# Altium PCB BCM_ECU_revA.PcbDoc (part 2 of 4)
Units mm, origin at the board's own origin, x right, y up, seen from the top; angles counter-clockwise.
Board outline 224 x 100 mm, 4 copper layers (TOP SIG, GND, PWR, BOT SIG), stack 0.603 mm thick; 389 components, 400 nets, 1315 pads, 143 vias.
Unrouted connection lines stored in the file: 689.
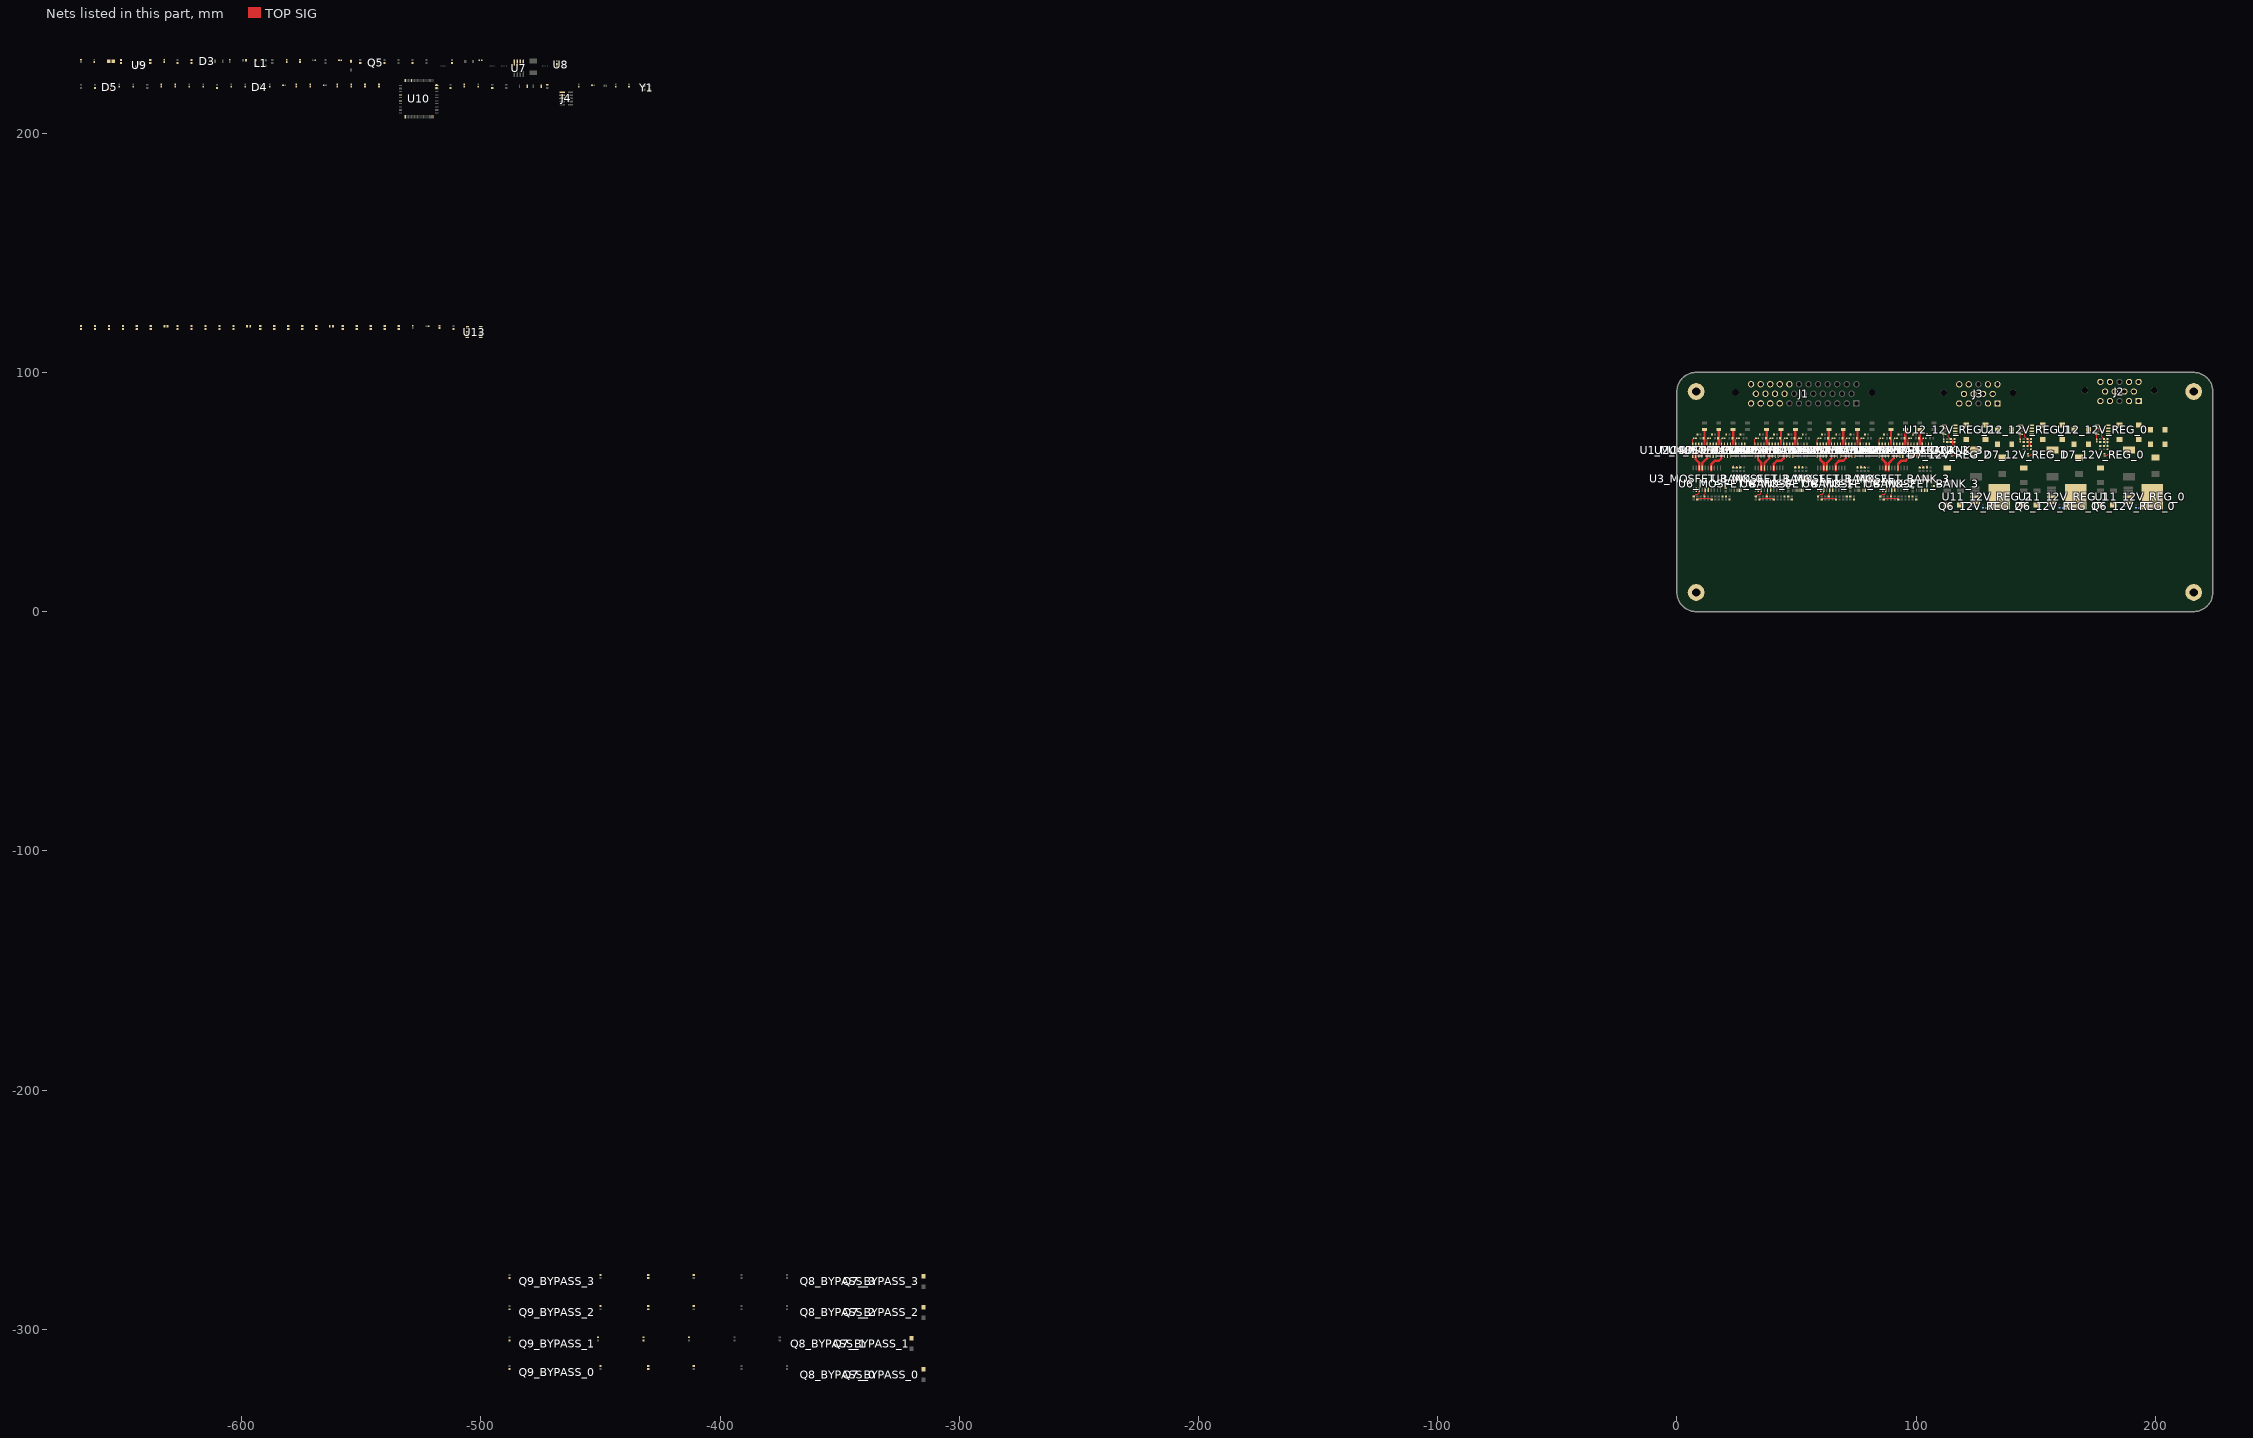
[diagram p2: the nets of this part, all layers, seen from the top]

## Footprints (in the part's own frame and the unit in brackets; to place one, negate y for a bottom-side part, rotate by r counter-clockwise, add the part's x,y. Pads: shape width x height; smd on the part's side, far side on the other; paste and mask are expansions set on the pad) (continued)
ONSC-SOD-123-2-425-04_V [mm] "SOD, 2-Leads, Body 2.69x1.6mm"
  rect 0.91x1.22 smd: 1(-1.635,0) 2(1.635,0)
  silkscreen extent -1.76,-0.8 0.78,1.28, body extent -1.35,-0.8 1.35,0.8, height 1.35
R0603B [mm] "Chip Resistor, 0603, 2-Leads, Body 1.58x0.85mm, IPC Medium Density"
  rrect25% 0.8x0.95 smd: 1(-0.65,0) 2(0.65,0)
  silkscreen extent -0.2,-0.7 0.2,0.7, body extent -0.82,-0.48 0.82,0.48, height 0.5
RESC1608X90X30ML15T20 [mm] "Chip Resistor, 2-Leads, Body 1.60x0.80mm, IPC Low Density"
  rect 0.95x1.05 smd: 1(-0.7,0) 2(0.7,0)
  body extent -0.88,-0.48 0.87,0.48, height 0.9
SISH615ADN-T1-GE3-Footprint-1 [mm]
  rect 0.35x0.5 smd paste+0 mask+0: 1(-0.937,-1.4) 2(-0.288,-1.4) 3(0.363,-1.4) 4(1.012,-1.4)
  round 0.025 smd mask+0: 5-6-7-8(0.038,0.51)
  TOP SIG region: -1.187,-0.63 -1.187,-0.215 -1.568,-0.215 -1.568,0.215 -1.187,0.215 -1.187,1.35 -1.137,1.35 -1.137,1.65 -0.737,1.65 -0.737,1.35 -0.487,1.35 -0.487,1.65 -0.088,1.65 -0.088,1.35 0.163,1.35 0.163,1.65 0.563,1.65 0.563,1.35 0.813,1.35 0.813,1.65 1.212,1.65 1.212,1.35 1.262,1.35 1.262,0.215 1.643,0.215 1.643,-0.215 1.262,-0.215 1.262,-0.63
  silkscreen extent -1.51,-2.37 1.59,-1.01, body extent -1.67,-1.75 1.74,1.75, height 0.25
SK34A-LTP-Footprint-1 [mil]
  rect 74x66 smd paste+0 mask+0: 1(-87,0) 2(87,0)
  silkscreen extent -162,-63 98,63
TCAN1146DYYRQ1-Footprint-1 [mil]
  rect 38.5x12 smd paste+0 mask+0: 1(-60.75,59.07) 2(-60.75,39.38) 3(-60.75,19.69) 4(-60.75,0) 5(-60.75,-19.69) 6(-60.75,-39.38) 7(-60.75,-59.07) 8(60.75,-59.07) 9(60.75,-39.38) 10(60.75,-19.69) 11(60.75,0) 12(60.75,19.69) 13(60.75,39.38) 14(60.75,59.07)
  silkscreen extent -46,-90 100,90, body extent -66,-84 66,84, height 43
WL-SBCD_0606 [mm] "SMT Bi-color Chip LED Diffuesed, body 1.5x1.6mm"
  rect 0.5x0.8 smd: 1(-0.45,0.8) 2(-0.45,-0.8) 3(0.45,-0.8) 4(0.45,0.8)
  silkscreen extent -0.07,1.48 0.08,1.62, body extent -0.75,-0.8 0.75,0.8, height 0.55

## Part data
C1_MOSFET_BANK_0 C1_MOSFET_BANK_1 C1_MOSFET_BANK_2 C1_MOSFET_BANK_3 C2_MOSFET_BANK_0 C2_MOSFET_BANK_1 C2_MOSFET_BANK_2 C2_MOSFET_BANK_3 C3_MOSFET_BANK_0 C3_MOSFET_BANK_1 C3_MOSFET_BANK_2 C3_MOSFET_BANK_3 C4_MOSFET_BANK_0 C4_MOSFET_BANK_1 C4_MOSFET_BANK_2 C4_MOSFET_BANK_3 C5_MOSFET_BANK_0 C5_MOSFET_BANK_1 C5_MOSFET_BANK_2 C5_MOSFET_BANK_3 C6_MOSFET_BANK_0 C6_MOSFET_BANK_1 C6_MOSFET_BANK_2 C6_MOSFET_BANK_3 C7_MOSFET_BANK_0 C7_MOSFET_BANK_1 C7_MOSFET_BANK_2 C7_MOSFET_BANK_3 C8 C9 C10 C11 C12 C13 C14 C16 C17 C48_12V_REG_0 C48_12V_REG_1 C48_12V_REG_2 C49 C50 C51: library part CMP-001-00058-1, "LARGE PADS, 0402 CAP, CHANGE COMMENT TO MATCH REAL P/N", Capacitor Type=Ceramic, Case/Package=0402, Max Operating Temperature=85°C, Min Operating Temperature=-55°C, Mounting Technology="Surface Mount", Pins=2, RoHS Compliant=Yes
C15: library part CMP-1036-04819-2, Manufacturer=Kemet, Part Number=C0805C225K9PACTU
C18 C19 C20 C21 C22 C23 C24 C25 C26 C27 C28 C29 C30 C31 C32 C33 C34 C35 C36 C37 C38 C39 C47_12V_REG_0 C47_12V_REG_1 C47_12V_REG_2: library part CMP-001-00000-11, "Non-polarized capacitor"
C40_12V_REG_0 C40_12V_REG_1 C40_12V_REG_2 C41_12V_REG_0 C41_12V_REG_1 C41_12V_REG_2 C42_12V_REG_0 C42_12V_REG_1 C42_12V_REG_2: library part CMP-04424-000178-1, "CAP TANT 68UF 10% 25V 2917", Capacitance=68uF, Case Code (Imperial)=2917, Case Code (Metric)=7343, Dielectric Material=Tantalum, ESR (Equivalent Series Resistance)=125mR, Leakage Current=17uA, Max Operating Temperature=125°C, Min Operating Temperature=-55°C, Package Quantity=1, Ripple Current=460uA, Tolerance=10%, Voltage=25V, Case/Package=2917, Depth=4.3mm, Dissipation Factor=6%, Features="General Purpose", Height=4.1mm, Height - Seated (Max)=0.169inch, Lead Free="Lead Free", Length=7.3mm, Mount="Surface Mount", Number of Pins=2, Packaging="Tape and Reel", Polarity=Polar, Radiation Hardening=No, REACH SVHC="No SVHC", RoHS Compliant=Yes, Series=TPS, Termination=SMD/SMT, Voltage Rating=25V, Voltage Rating (DC)=25V, Width=4.3mm
C43_12V_REG_0 C43_12V_REG_1 C43_12V_REG_2 C44_12V_REG_0 C44_12V_REG_1 C44_12V_REG_2 C45_12V_REG_0 C45_12V_REG_1 C45_12V_REG_2 C46_12V_REG_0 C46_12V_REG_1 C46_12V_REG_2: library part CMP-2000-07207-2, "CAP TANT 100UF 10% 16V 2917", Capacitance=100uF, Case Code (Imperial)=2917, Case Code (Metric)=7343, Dielectric Material=Tantalum, ESR (Equivalent Series Resistance)=125mR, Max Operating Temperature=125°C, Min Operating Temperature=-55°C, Package Quantity=1, Tolerance=10%, Voltage=16V, Case/Package=2917, Construction=Flat, Depth=4.3mm, Dissipation Factor=8%, Failure Rate=0.001%, Features="General Purpose", Height=2.8mm, Height - Seated (Max)=0.122inch, Length=7.3mm, Life (Hours)=2000Hour, Mount="Surface Mount", Number of Pins=2, Packaging="Tape and Reel", Polarity=Polar, Radiation Hardening=No, REACH SVHC="No SVHC", RoHS Compliant=Yes, Series=T495, Termination=SMD/SMT, Voltage Rating=16V, Voltage Rating (DC)=16V, Weight=0.023634oz, Width=0.169inch
D1: library part CMP-1060-00565-1, "Zener Voltage Regulator, 500 mW, 2-Pin SOD-123, Pb-Free, Tape and Reel", Manufacturer="On Semiconductor", ComponentLink1Description="Manufacturer URL", ComponentLink1URL=http://www.onsemi.com/, ComponentLink2Description=Datasheet, ComponentLink2URL=http://www.onsemi.com/pub_link/Collateral/MMSZ5221BT1-D.PDF, ComponentLink3Description="Package Specification", ComponentLink3URL=http://www.onsemi.com/pub_link/Collateral/425-04.PDF, DatasheetVersion="Rev. 12", Mounting Technology="Surface Mount", P Max (W)=0.5, PackageDescription="2-Pin SOD, Body 1.6 x 2.69 mm", PackageReference=SOD-123-2-425-04, PackageVersion="Rev. G, 10/2009", Packing="Tape and Reel", PartNumber=MMSZ5242BT1G, RoHS=Pb-Free, VZ Typ (V)=12
D2: library part CMP-2000-04993-2, "DIODE GEN PURP 100V 150MA SOD123", Average Rectified Current=150mA, Capacitance=4pF, Forward Voltage=1V, Max Forward Surge Current (Ifsm)=1A, Max Operating Temperature=150°C, Max Repetitive Reverse Voltage (Vrrm)=100V, Max Reverse Leakage Current=5uA, Max Surge Current=2A, Min Operating Temperature=-65°C, Package Quantity=3000, Power Dissipation=400mW, Current Rating=150mA, Element Configuration=Single, Forward Current=150mA, Height=1.2mm, Lead Free="Lead Free", Length=2.85mm, Max Reverse Voltage (DC)=100V, Mount="Surface Mount", Number of Pins=2, Output Current=150mA, Packaging="Tape and Reel", Peak Non-Repetitive Surge Current=2A, Polarity=Standard, Radiation Hardening=No, Recovery Time=4ns, Reverse Recovery Time=4ns, Voltage Rating (DC)=100V, Width=1.8mm
D3: library part CMP-12225-000055-1, "TVS DIODE 26.5V 44V SOT323-3", Breakdown Voltage=28.5V, Capacitance=3pF, Clamping Voltage=44V, Manufacturer=STMicroelectronics, Max Junction Temp=+175°C, Package=SOT323-3L, Peak Pulse Current=3A, Peak Pulse Power=170W, Reverse Standoff Voltage=26.5V, Temperature="-55°C to +175°C", Temperature Range Low=-55°C, Automotive=Yes, Automotive Grade="Grade 0", Category=Diode, ComponentLink2Description=Datasheet, ComponentLink2URL=https://www.st.com/resource/en/datasheet/esdcan02-2bwy.pdf, Device Class L1="Circuit Protection", Device Class L2="TVS Diodes", Device Class L3=unset, Digikey Description="TVS DIODE 26.5V 44V SOT323-3", Direction=Bidirectional, Height=1.1mm, Ipc Land Pattern Name=SOT65P210X95-3, Lead Free=Yes, Manufacturer Part Number=ESDCAN02-2BWY, Mouser Description="TVS Diodes / ESD Suppressors Automotive dual-line Transil, Transient voltage suppressor (TVS) for CAN bus", Number Of Channels=2, Octopart=https://octopart.com/esdcan02-2bwy-stmicroelectronics-58631133, RoHS=TRUE, Standoff Height=0mm, Temperature Range High=+175°C
D4 D5 D7_12V_REG_0 D7_12V_REG_1 D7_12V_REG_2: library part CMP-004-00040-2, "Led, Red/Grn, 180Mcd/230Mcd, 624Nm/525Nm Rohs Compliant: Yes", Component Type=Standard, Design Item ID=CMP-004-00034-2, Pins=4, Source=rgled.SchLib
D6_12V_REG_0 D6_12V_REG_1 D6_12V_REG_2: library part CMP-2000-05097-3, "DIODE SCHOTTKY 40V 5A SMC", Capacitance=300pF, Forward Current=5A, Manufacturer="Diodes Inc.", Max Junction Temp=+150°C, Max Repetitive Reverse Voltage=40V, Max Surge Forward Current=100A, Package=SMC, Peak Reverse Current=0.5mA, Temperature="-55°C to +150°C", Temperature Range Low=-55°C, Automotive=No, Automotive Grade=NA, Category=Diode, ComponentLink2Description=Datasheet, ComponentLink2URL=https://www.diodes.com/assets/Datasheets/ds13012.pdf, Device Class L1="Discrete Semiconductors", Device Class L2=Diodes, Device Class L3="Schottky Diodes", Digikey Description="DIODE SCHOTTKY 40V 5A SMC", Footprint Url=https://www.diodes.com/assets/Package-Files/SMC.pdf, Height=2.5mm, Lead Free=Yes, Manufacturer Part Number=B540C-13-F, Mouser Description="Diode: Schottky rectifying; SMD; 40V; 5A; SMC; Package: reel, tape", Octopart=https://octopart.com/b540c-13-f-diodes+inc.-325873, Reverse Voltage=40V, RoHS=TRUE, Standoff Height=0.1mm, Temperature Range High=+150°C
D8_BYPASS_0 D8_BYPASS_1 D8_BYPASS_2 D8_BYPASS_3: library part CMP-004-00058-2, "Rectifier Diode, Schottky, 1 Phase, 1 Element, 3A, 40V V(RRM), Silicon, DO-214AC", Forward Voltage=500mV, Max Operating Temperature=125°C, Pins=2, RoHS Compliant=Yes
F1: library part CMP-16042-000002-1, "DIFF P#!!! /  / FUSE BRD MNT 10A 125VAC/VDC", Fuse Current=15A, Fuse Interrupt Ac Current=50A, Fuse Interrupt Dc Current=300A, Fuse Voltage Drop=0.13V, Manufacturer="Bel Fuse", Manufacturer Part Number=0679L9150-01, Max Fuse Ac Voltage=125V, Package=0679L, Resistance=0.0038Ω, Temperature="-55°C to +125°C", Temperature Range High=+125°C, Temperature Range Low=-55°C, Automotive=Yes, Automotive Grade="Grade 1", Category=Fuse, ComponentLink2Description=Datasheet, ComponentLink2URL=https://www.belfuse.com/resources/CircuitProtection/datasheets/0679L%20Sep2016.pdf, Device Class L1="Circuit Protection", Device Class L2=Fuses, Device Class L3=unset, Digikey Description="FUSE BRD MNT 15A 125VAC/VDC", Fuse Blow Speed=Fast, Fuse I2T=103.5A2Sec, Height=2.79mm, Ipc Land Pattern Name=CAPC610254X254, Lead Free=Yes, Max Fuse Dc Voltage=125V, Octopart=https://octopart.com/0679l9150-01-bel+fuse-70850665, RoHS=TRUE, Voltage Rating=125V
F2_MOSFET_BANK_0 F2_MOSFET_BANK_1 F2_MOSFET_BANK_2 F2_MOSFET_BANK_3 F3_MOSFET_BANK_0 F3_MOSFET_BANK_1 F3_MOSFET_BANK_2 F3_MOSFET_BANK_3 F4_MOSFET_BANK_0 F4_MOSFET_BANK_1 F4_MOSFET_BANK_2 F4_MOSFET_BANK_3 F5_MOSFET_BANK_0 F5_MOSFET_BANK_1 F5_MOSFET_BANK_2 F5_MOSFET_BANK_3: library part CMP-08605-000054-1, "FUSE BOARD MNT 3A 32VAC/VDC 1206", Fuse Current=3A, Fuse Interrupt Ac Current=50A, Fuse Voltage Drop=75.99mV, Manufacturer=Littelfuse, Max Fuse Ac Voltage=32V, Package=0466, Resistance=0.019Ω, Temperature="-55°C to +90°C", Temperature Range High=+90°C, Temperature Range Low=-55°C, Automotive=No, Category=Fuse, ComponentLink2Description=Datasheet, ComponentLink2URL=https://www.littelfuse.com/~/media/electronics/datasheets/fuses/littelfuse_fuse_466_datasheet.pdf.pdf, Device Class L1="Circuit Protection", Device Class L2=Fuses, Device Class L3=unset, Digikey Description="FUSE BOARD MNT 3A 32VAC/VDC 1206", Fuse Blow Speed=Fast, Fuse I2T=0.576A2Sec, Fuse Interrupt Dc Current=50A, Height=0.66mm, Lead Free=Yes, Manufacturer Part Number=0466003.NR, Max Fuse Dc Voltage=32V, Mouser Description="Surface Mount Fuses 32V 3A VFA Slimline", Octopart=https://octopart.com/0466003.nr-littelfuse-565175, RoHS=TRUE, Voltage Rating=32V
FB1: library part CMP-0686-00252-4, "Chip Ferrite Bead, 0402, 600Ω @ 100MHz, 0.23Ω, 25%, 900mA", Case Code (Imperial)=0402, Case Code (Metric)=1005, Current Rating=900mA, DC Resistance (DCR)=230mR, Max Operating Temperature=125°C, Min Operating Temperature=-55°C, Package Quantity=10000, Test Frequency=100MHz, Tolerance=25%, Case/Package=0402, Height=0.5mm, Impedance=600R, Lead Free="Lead Free", Length=1mm, Material=Steel, Max Current Rating=900mA, Max DC Current=900mA, Number of Circuits=1, Number of Lines=1, Number of Pins=2, Packaging="Tape and Reel", Termination=SMD/SMT, Width=0.5mm
J1: library part CMP-03369-000154-1, "CONN HEADER R/A 35POS 4MM", Color=Black, Current Rating=17A, Flammability Rating="UL94 V-0", Max Operating Temperature=221°C, Max Voltage Rating (AC)=250V, Min Operating Temperature=-40°C, Package Quantity=1, Circuit Application=Power, Connector System=Wire-to-Device, Connector Type="Male Pin", Contact Material=Brass, Contact Plating=Tin, Contact Type="Male Pin", Depth=37.9mm, ELV=Compliant, Fastening Type=Ramp, Gender=Male, Height=32.1mm, Housing Material=Thermoplastic, Insulation=Insulated, Lead Free="Lead Free", Length=3.03inch, Mount="Through Hole", Number of Contacts=35, Number of Positions=35, Number of Rows=3, Number of Signal Positions=35, Orientation="Right Angle", Packaging=Bulk, PCB Mount Alignment="Yes (With)", PCB Mount Retention=With, PCB Thickness=0.062inch, Pitch=0.157inch, Primary Type=Rectangular, Radiation Hardening=No, RoHS Compliant=Yes, Row Spacing=0.157inch, Sealable="Yes (With)", Series=Ampseal, Shielding=Unshielded, Tab Thickness=1.3mm, Termination=Solder, Width=37.9mm
J2 J3: library part CMP-002-00075-1, "Combination Line Connector, 14 Contact(s), Male, Solder Terminal - MODEL IS CODE2 BUT USE CODE1", Mounting Technology=Board, RoHS Compliant=Yes
J4: library part CMP-001-0013-3, "CONN HEADER SMD 10POS 1.27MM"
L1: library part CMP-07251-000006-1, "CMC 51UH 200MA 2LN 2KOHM SMD", Case/Package=4532, Current=200mA, DC Resistance (DCR)=3.5R, Inductance=51uH, Insulation Resistance=10MR, Max Operating Temperature=125°C, Min Operating Temperature=-40°C, Package Quantity=1, Resistance=2kR, Self Resonant Frequency=100kHz, Tolerance=50%, Voltage Rating (DC)=50V, Contact Plating=Tin, Core Material=Ferrite, Current Rating=200mA, DC Current=200mA, Depth=3.4mm, Element Configuration=Dual, Height=0.118inch, Impedance=2kR, Lead Free="Lead Free", Length=4.5mm, Material=Steel, Max DC Current=200mA, Mount="Surface Mount", Number of Lines=2, Packaging="Tape and Reel", REACH SVHC="No SVHC", RoHS Compliant=Yes, Series=SRF4532, Termination=SMD/SMT, Test Frequency=100kHz, Width=0.126inch
L2_12V_REG_0 L2_12V_REG_1 L2_12V_REG_2: library part CMP-07248-000069-1, "FIXED IND 10UH 10A 16.5 MOHM SMD", Case/Package=Nonstandard, Current Rating=10A, DC Resistance (DCR)=16.5mR, Inductance=10uH, Inductance Tolerance=20%, Max Operating Temperature=150°C, Min Operating Temperature=-40°C, Package Quantity=500, Ratings=AEC-Q200, Resistor Type=Wirewound, Saturation Current=15.5A, Self Resonant Frequency=10MHz, Test Frequency=100kHz, Core Material="Carbonyl Powder", Depth=12.5mm, Height=6.2mm, Height - Seated (Max)=0.252inch, Length=13.5mm, Max DC Current=10A, Mount="Surface Mount", Packaging="Cut Tape", Q Factor=20, REACH SVHC="No SVHC", RMS Current (Irms)=10A, RoHS Compliant=Yes, Shielding=Shielded, Termination=SMD/SMT, Tolerance=20%, Width=0.492inch
Q1 Q2 Q3 Q4 Q7_BYPASS_0 Q7_BYPASS_1 Q7_BYPASS_2 Q7_BYPASS_3 Q8_BYPASS_0 Q8_BYPASS_1 Q8_BYPASS_2 Q8_BYPASS_3: library part CMP-013-00018-2, "Trans MOSFET P-CH 20V 22.1A 8-Pin PowerPAK 1212 EP T/R", Component Type=Standard, Design Item ID=CMP-013-00036-4, Pins=5, Source=SISH615ADN-T1-GE3.SchLib
Q5 Q6_12V_REG_0 Q6_12V_REG_1 Q6_12V_REG_2: library part CMP-2000-05968-1, "N-Channel Enhancement Mode Mosfet, 50 V, 200 mA, -55 to 150 degC, 6-Pin SOT-323, RoHS, Tape and Reel", Id - Continuous Drain Current=200mA, Manufacturer=DiodesIncorporated, Maximum Operating Temperature=+150C, Minimum Operating Temperature=-55C, Package / Case=SOT-323-3, Package Description="3-Pin Small Outline Transistor, Body 2 x 1.25 mm, Pitch 0.65 mm", Package Reference=SOT323, Pd - Power Dissipation=200mW, Rds On - Drain-Source Resistance=1.4Ohms, Vds - Drain-Source Breakdown Voltage=75V, Vgs - Gate-Source Voltage=20V, Brand=DiodesIncorporated, Channel Mode=Enhancement, Configuration=Single, Datasheet URL=http://www.diodes.com/_files/datasheets/ds30206.pdf, Datasheet Version="Rev. 11-2, 09/2013", Factory Pack Quantity=3000, Forward Transconductance - Min=0.1S, Height=1mm, Length=2.2mm, Manufacturer URL=http://www.diodes.com/, Mounting Style=SMD/SMT, Mounting Technology=SurfaceMount, Number Of Channels=1Channel, Packaging=Reel, Product=MOSFETSmallSignal, Product Category=MOSFET, RoHS=True, Series=BSS138, Technology=Si, Transistor Polarity=N-Channel, Transistor Type=1N-Channel, Type=EnhancementModeFieldEffectTransistor, Typical Turn-Off Delay Time=20ns, Typical Turn-On Delay Time=20ns, Unit Weight=0.000212oz, Width=1.35mm
Q9_BYPASS_0 Q9_BYPASS_1 Q9_BYPASS_2 Q9_BYPASS_3: library part CMP-35916-000023-1, "SMALL-SIGNAL MOSFET 2 IN 1 NCH +"
R1_MOSFET_BANK_0 R1_MOSFET_BANK_1 R1_MOSFET_BANK_2 R1_MOSFET_BANK_3 R2_MOSFET_BANK_0 R2_MOSFET_BANK_1 R2_MOSFET_BANK_2 R2_MOSFET_BANK_3 R3_MOSFET_BANK_0 R3_MOSFET_BANK_1 R3_MOSFET_BANK_2 R3_MOSFET_BANK_3 R4_MOSFET_BANK_0 R4_MOSFET_BANK_1 R4_MOSFET_BANK_2 R4_MOSFET_BANK_3 R5_12V_REG_0 R5_12V_REG_1 R5_12V_REG_2 R6_MOSFET_BANK_0 R6_MOSFET_BANK_1 R6_MOSFET_BANK_2 R6_MOSFET_BANK_3 R7_12V_REG_0 R7_12V_REG_1 R7_12V_REG_2 R8_MOSFET_BANK_0 R8_MOSFET_BANK_1 R8_MOSFET_BANK_2 R8_MOSFET_BANK_3 R9_MOSFET_BANK_0 R9_MOSFET_BANK_1 R9_MOSFET_BANK_2 R9_MOSFET_BANK_3 R10_MOSFET_BANK_0 R10_MOSFET_BANK_1 R10_MOSFET_BANK_2 R10_MOSFET_BANK_3 R11_MOSFET_BANK_0 R11_MOSFET_BANK_1 R11_MOSFET_BANK_2 R11_MOSFET_BANK_3 R12_MOSFET_BANK_0 R12_MOSFET_BANK_1 R12_MOSFET_BANK_2 R12_MOSFET_BANK_3 R14_MOSFET_BANK_0 R14_MOSFET_BANK_1 R14_MOSFET_BANK_2 R14_MOSFET_BANK_3 R15_MOSFET_BANK_0 R15_MOSFET_BANK_1 R15_MOSFET_BANK_2 R15_MOSFET_BANK_3 R16_MOSFET_BANK_0 R16_MOSFET_BANK_1 R16_MOSFET_BANK_2 R16_MOSFET_BANK_3 R17_MOSFET_BANK_0 R17_MOSFET_BANK_1 R17_MOSFET_BANK_2 R17_MOSFET_BANK_3 R18_MOSFET_BANK_0 R18_MOSFET_BANK_1 R18_MOSFET_BANK_2 R18_MOSFET_BANK_3 R19_MOSFET_BANK_0 R19_MOSFET_BANK_1 R19_MOSFET_BANK_2 R19_MOSFET_BANK_3 R20_MOSFET_BANK_0 R20_MOSFET_BANK_1 R20_MOSFET_BANK_2 R20_MOSFET_BANK_3 R21_MOSFET_BANK_0 R21_MOSFET_BANK_1 R21_MOSFET_BANK_2 R21_MOSFET_BANK_3 R22_MOSFET_BANK_0 R22_MOSFET_BANK_1 R22_MOSFET_BANK_2 R22_MOSFET_BANK_3 R23_MOSFET_BANK_0 R23_MOSFET_BANK_1 R23_MOSFET_BANK_2 R23_MOSFET_BANK_3 R24_MOSFET_BANK_0 R24_MOSFET_BANK_1 R24_MOSFET_BANK_2 R24_MOSFET_BANK_3 R25_MOSFET_BANK_0 R25_MOSFET_BANK_1 R25_MOSFET_BANK_2 R25_MOSFET_BANK_3 R26_MOSFET_BANK_0 R26_MOSFET_BANK_1 R26_MOSFET_BANK_2 R26_MOSFET_BANK_3 R27_MOSFET_BANK_0 R27_MOSFET_BANK_1 R27_MOSFET_BANK_2 R27_MOSFET_BANK_3 R28 R29 R30 R31 R32 R33 R34 R35 R36 R37 R38 R39 R40 R41 R42 R43 R44 R45 R46 R47 R48 R49 R50_12V_REG_0 R50_12V_REG_1 R50_12V_REG_2 R51_12V_REG_0 R51_12V_REG_1 R51_12V_REG_2 R52_12V_REG_0 R52_12V_REG_1 R52_12V_REG_2 R53_12V_REG_0 R53_12V_REG_1 R53_12V_REG_2 R54_12V_REG_0 R54_12V_REG_1 R54_12V_REG_2 R55_12V_REG_0 R55_12V_REG_1 R55_12V_REG_2 R56_BYPASS_0 R56_BYPASS_1 R56_BYPASS_2 R56_BYPASS_3 R57_BYPASS_0 R57_BYPASS_1 R57_BYPASS_2 R57_BYPASS_3 R58_BYPASS_0 R58_BYPASS_1 R58_BYPASS_2 R58_BYPASS_3 R59_BYPASS_0 R59_BYPASS_1 R59_BYPASS_2 R59_BYPASS_3 R60_BYPASS_0 R60_BYPASS_1 R60_BYPASS_2 R60_BYPASS_3 R61_BYPASS_0 R61_BYPASS_1 R61_BYPASS_2 R61_BYPASS_3 R62 R63 R64 R65 R66 R67 R68 R69 R70 R71 R72 R73 R74 R75 R76 R77 R78 R79 R80 R81 R82 R83 R84 R85 R86 R87_12V_REG_0 R87_12V_REG_1 R87_12V_REG_2: library part CMP-009-00002-14, "Resistor"
R13_MOSFET_BANK_0 R13_MOSFET_BANK_1 R13_MOSFET_BANK_2 R13_MOSFET_BANK_3: library part CMP-2000-00869-1, Manufacturer=Panasonic, Part Number=ERT-J1VR103J
SW1 SW2 SW3: library part CMP-10040-000029-1, "SWITCH TACTILE SPST-NO 0.02A 15V", Current Rating=5A, Flammability Rating="UL94 V-0", Insulation Color=Black, Max Operating Temperature=85°C, Min Operating Temperature=-40°C, Operating Force=240gf, Actuator Type=Standard, Connector Type=USB, Contact Plating=Gold, Gender=Receptacle, Illumination Type=Non-Illuminated, Mechanical Life=500000Cycles, Mount="Surface Mount", Number of Contacts=24, Number of Ports=1, Packaging="Tape and Reel", Switch Function=Off-Mom, Switch Travel=0.13mm, Termination=Solder, Throw Configuration=SPST
U1_MOSFET_BANK_0 U1_MOSFET_BANK_1 U1_MOSFET_BANK_2 U1_MOSFET_BANK_3 U2_MOSFET_BANK_0 U2_MOSFET_BANK_1 U2_MOSFET_BANK_2 U2_MOSFET_BANK_3 U4_MOSFET_BANK_0 U4_MOSFET_BANK_1 U4_MOSFET_BANK_2 U4_MOSFET_BANK_3 U5_MOSFET_BANK_0 U5_MOSFET_BANK_1 U5_MOSFET_BANK_2 U5_MOSFET_BANK_3 U12_12V_REG_0 U12_12V_REG_1 U12_12V_REG_2: library part CMP-1557-00012-2, "SENSOR CURRENT HALL 12.5A AC/DC", Case/Package=SOIC, Current Sensing=12.5A, Frequency=100kHz, Max Operating Temperature=125°C, Max Supply Current=5.5mA, Max Supply Voltage=5.5V, Min Operating Temperature=-40°C, Min Supply Voltage=3V, Operating Supply Voltage=3.3V, Package Quantity=1, Quiescent Current=4mA, -3db Bandwidth=100kHz, Accuracy=5%, Bandwidth=100kHz, Height=1.5mm, Length=4.9mm, Linearity=1%, Number Of Channels=1, Number of Pins=8, Packaging="Tape and Reel", Polarity=Bidirectional, REACH SVHC="No SVHC", Response Time=4.6us, RoHS Compliant=Yes, Sensitivity=110mV/A, Series=-, Width=3.9mm
U3_MOSFET_BANK_0 U3_MOSFET_BANK_1 U3_MOSFET_BANK_2 U3_MOSFET_BANK_3: library part CMP-1095-00041-1, "Smart High-Side Power Switch for Industrial Applications 4 Channels: 4 x 140 mOhm Status Feedback, 5.5 to 40 V Operating, -30 to 85 degC, PG-DSO-20-32, Reel, Green", Load Current (typ)="1.3Â A", Manufacturer=Infineon, Operating Voltage Range (max)="40 V", Operating Voltage Range (min)="5.5Â V", Channels=4, ComponentLink1Description="Manufacturer URL", ComponentLink1URL=http://www.infineon.com/, ComponentLink2Description=Datasheet, ComponentLink2URL=http://www.infineon.com/dgdl/ITS716G_DS11_20081002.pdf?folderId=db3a304412b407950112b408e8c90004&fileId=db3a304412b407950112b428c2cf3e6d, ComponentLink3Description="Package Specification", ComponentLink3URL=http://www.infineon.com/dgdl/BTS+4130QGA_DS10+_neu.pdf?folderId=db3a304314dca389011537739e37155f&fileId=db3a30431a5c32f2011a957932285680&sId=db3a30433d68e984013d7f42d6576278, DatasheetVersion="Rev. 1.1", Diagnostic=Digital, Green=TRUE, Halogen-free=available, IL (nom)min - all channels active="1.3Â A", IL (nom)min - one channel active="2.3Â A", IL (SC)="9 A", IL (SCp)="9 A", Mounting Technology="Surface Mount", PackageDescription="20-Pin Plastic (Green) Dual Small Outline Package, 12.7 x 7.5 mm Body, 1.27 mm Pitch", PackageReference=PG-DSO-20-32, PackageVersion=Mar-08, Packing=Reel, PartNumber=ITS716G, Ptot (max)="3.6Â W", RON (max) @ Tj max="280 mOhm", RON @ 25 degC="140 mOhm (max)", toff (max)="270 us", ton (max)="250 us"
U6_MOSFET_BANK_0 U6_MOSFET_BANK_1 U6_MOSFET_BANK_2 U6_MOSFET_BANK_3 U13: library part CMP-0054-00372-2, "8-Channel, 50 kSPS to 200 kSPS, 8-Bit A/D Converter, 16-pin TSSOP, Pb-Free", Manufacturer="National Semiconductor", PackageTopMarking=NSUZXYTT*88S022*CIMT, PowerWise=Y, Code_JEDEC=MO-153-AB, ComponentLink1Description="ADC088S022 Datasheet", ComponentLink1URL=http://www.national.com/ds/AD/ADC088S022.pdf, ComponentLink2Description="ADC088S022 Web Page", ComponentLink2URL=http://www.national.com/pf/AD/ADC088S022.html, ComponentLink3Description="MTC16 Package Page", ComponentLink3URL=http://www.national.com/packaging/folders/mtc16.html, CompType="ADC IC", DatasheetVersion=Feb-2010, PackageDescription="Molded TSSOP, Jedec, 5 x 4.4 x 0.9mm Body, 16 Lead, 0.65mm Pitch", PackageReference=MTC16, PackageVersion="revD, Jun-2003", PinCount=16, RevisionNote="Component URLs added", RoHS=Y
U7: library part CMP-1557-00015-2, "SENSOR CURRENT HALL 25A AC/DC", Case/Package=SOIC, Current Sensing=25A, Frequency=100kHz, Max Operating Temperature=125°C, Max Supply Current=5.5mA, Max Supply Voltage=5.5V, Min Operating Temperature=-40°C, Min Supply Voltage=3V, Operating Supply Voltage=3.3V, Package Quantity=1, Quiescent Current=4mA, -3db Bandwidth=100kHz, Accuracy=4%, Bandwidth=100kHz, Height=1.5mm, Length=4.9mm, Linearity=1%, Number Of Channels=1, Number of Pins=8, Packaging="Tape and Reel", Polarity=Bidirectional, REACH SVHC="No SVHC", Response Time=4.6us, RoHS Compliant=Yes, Sensitivity=55mV/A, Series=-, Width=3.9mm
U8: library part CMP-318-000000-2, "Automotive CAN FD transceiver with watchdog, bus diagnostics and partial networking via sele 14-SOT-23-THIN -40 to 150", Component Type=Standard, Design Item ID=CMP-015-00012-2, Pin Count=14, Source=TCAN1146DYYRQ1.SchLib
U9: library part CMP-12756-000009-1, "IC REG LINEAR 5V 150MA SOT89", Ambient Temperature Range High=+85°C, Ambient Temperature Range Low=-40°C, Dropout Voltage=1000mV, Manufacturer="Diodes Inc.", Max Junction Temp=+125°C, Max Supply Voltage=40V, Min Supply Voltage=3.3V, Nominal Supply Current=2.5-25uA, Output Current=150mA, Output Voltage=5V, Package=SOT89, Temperature="-40°C to +125°C", Automotive=No, Category=IC, ComponentLink2Description=Datasheet, ComponentLink2URL=https://www.diodes.com/assets/Datasheets/AP7381.pdf, Device Class L1="Integrated Circuits (ICs)", Device Class L2="Power Management ICs", Device Class L3="Voltage Regulators - Linear", Digikey Description="IC REG LINEAR 5V 150MA SOT89", Footprint Url=https://www.diodes.com/assets/Package-Files/SOT89.pdf, Height=1.6mm, Lead Free=Yes, Manufacturer Part Number=AP7381-50Y-13, Number Of Outputs=1, Octopart=https://octopart.com/ap7381-50y-13-diodes+inc.-87775116, Output Type=Fixed, RoHS=TRUE, Temperature Range High=+125°C, Temperature Range Low=-40°C
U10: library part CMP-12105-000107-1, "IC MCU 32BIT 128KB FLASH 100LQFP"
U11_12V_REG_0 U11_12V_REG_1 U11_12V_REG_2: library part CMP-0069-00198-3, "SIMPLE SWITCHER® High Efficiency 5A Step-Down Voltage Regulator with Sync, 7-pin TO-263, Pb-Free", Manufacturer="Texas Instruments", PackageTopMarking=NSUZXYTTE#*LM2677S*-12, PowerWise=N, Code_JEDEC=MO-169-AC, ComponentLink1Description="Datasheet URL", ComponentLink1URL=http://www.ti.com/general/docs/lit/getliterature.tsp?genericPartNumber=LM2677&fileType=pdf, CompType=Switcher, PackageDescription="TO-263, Molded, .400 x .390 x .180in Body, 7 Lead, .050in Pitch, Surface Mount", PackageReference=KTW0007B, PinCount=7, RoHS=Y
Y1: library part CMP-27762-011708-1, "Crystal 48MHz ±20ppm 18pF SMD-4 3.2mm x 2.5mm", Case/Package=CSMD, ESR (Equivalent Series Resistance)=35R, Frequency=48MHz, Frequency Stability=50ppm, Frequency Tolerance=20ppm, Load Capacitance=18pF, Max Operating Temperature=70°C, Min Operating Temperature=-20°C, Operating Frequency="48 MHz", Package Quantity=1000, Resistor Type=Ceramic, Depth=2.5mm, Height=0.031inch, Lead Free="Lead Free", Length=3.2mm, Mount="Surface Mount", Number of Pins=4, Packaging="Tape and Reel", Radiation Hardening=No, REACH SVHC="No SVHC", RoHS Compliant=Yes, Series=ABM8, Series Resistance=35R, Termination=SMD/SMT, Tolerance=20ppm, Width=0.098inch
Y2: library part CMP-40224-000006-1, "CRYSTAL 32.7680KHZ 12.5PF SMD", Frequency=32.768kHz, Load Capacitance=12.5pF, Manufacturer="ECS International", Package=ECX-1210, Temperature="-40°C to +85°C", Temperature Range High=+85°C, Temperature Range Low=-40°C, Tolerance=20ppm, Automotive=No, Category=Crys, ComponentLink2Description=Datasheet, ComponentLink2URL=https://ecsxtal.com/store/pdf/ECX-1210.pdf, Device Class L1="Passive Components", Device Class L2="Crystals / Oscillators", Device Class L3=Crystals, Digikey Description="CRYSTAL 32.7680KHZ 12.5PF SMD", Esr=90kΩ, Height=0.5mm, Lead Free=Yes, Manufacturer Part Number=ECS-.327-12.5-1210-TR, Octopart=https://octopart.com/ecs-.327-12.5-1210-tr-ecs+international-81221340, RoHS=TRUE, Series=ECX-1210

## Free pads (board coordinates)
  round 7 hole 3.5: 2(8,8) 2(8,92) 2(216,92) 2(216,8)

## Via types
v1: diameter 0.5, hole 0.3, TOP SIG to BOT SIG, 143 vias

## Nets (pads, with @x,y where several pads share a name; then routed paths per layer and width w, separated by ;. In a path a pad name is that pad's centre, name@x,y a point inside that pad or via, vN(x,y) a via of type N, cw(c..) or ccw(c..) an arc to the next point about the centre after c; other vN are vias at no path point)
3V3: C1_MOSFET_BANK_0.1 C1_MOSFET_BANK_1.1 C1_MOSFET_BANK_2.1 C1_MOSFET_BANK_3.1 C2_MOSFET_BANK_0.1 C2_MOSFET_BANK_1.1 C2_MOSFET_BANK_2.1 C2_MOSFET_BANK_3.1 C3_MOSFET_BANK_0.1 C3_MOSFET_BANK_1.1 C3_MOSFET_BANK_2.1 C3_MOSFET_BANK_3.1 C4_MOSFET_BANK_0.1 C4_MOSFET_BANK_1.1 C4_MOSFET_BANK_2.1 C4_MOSFET_BANK_3.1 C5_MOSFET_BANK_0.1 C5_MOSFET_BANK_1.1 C5_MOSFET_BANK_2.1 C5_MOSFET_BANK_3.1 C8.1 C10.1 C22.1 C24.2 C25.2 C26.2 C27.2 C28.2 C29.2 C36.2 C37.2 C48_12V_REG_0.1 C48_12V_REG_1.1 C48_12V_REG_2.1 C49.1 D4.2 D4.3 D5.2 D5.3 D7_12V_REG_0.3 D7_12V_REG_1.3 D7_12V_REG_2.3 FB1.1 J4.1 R9_MOSFET_BANK_0.2 R9_MOSFET_BANK_1.2 R9_MOSFET_BANK_2.2 R9_MOSFET_BANK_3.2 R11_MOSFET_BANK_0.2 R11_MOSFET_BANK_1.2 R11_MOSFET_BANK_2.2 R11_MOSFET_BANK_3.2 R12_MOSFET_BANK_0.2 R12_MOSFET_BANK_1.2 R12_MOSFET_BANK_2.2 R12_MOSFET_BANK_3.2 R13_MOSFET_BANK_0.2 R13_MOSFET_BANK_1.2 R13_MOSFET_BANK_2.2 R13_MOSFET_BANK_3.2 R18_MOSFET_BANK_0.1 R18_MOSFET_BANK_1.1 R18_MOSFET_BANK_2.1 R18_MOSFET_BANK_3.1 R41.2 R45.1 R51_12V_REG_0.1 R51_12V_REG_1.1 R51_12V_REG_2.1 R62.1 R63.2 R64.2 R65.2 R66.2 R67.2 R68.2 R69.2 R70.2 SW2.2 U1_MOSFET_BANK_0.8 U1_MOSFET_BANK_1.8 U1_MOSFET_BANK_2.8 U1_MOSFET_BANK_3.8 U2_MOSFET_BANK_0.8 U2_MOSFET_BANK_1.8 U2_MOSFET_BANK_2.8 U2_MOSFET_BANK_3.8 U4_MOSFET_BANK_0.8 U4_MOSFET_BANK_1.8 U4_MOSFET_BANK_2.8 U4_MOSFET_BANK_3.8 U5_MOSFET_BANK_0.8 U5_MOSFET_BANK_1.8 U5_MOSFET_BANK_2.8 U5_MOSFET_BANK_3.8 U6_MOSFET_BANK_0.2 U6_MOSFET_BANK_1.2 U6_MOSFET_BANK_2.2 U6_MOSFET_BANK_3.2 U7.8 U8.5 U10.6 U10.11 U10.27 U10.50 U10.75 U10.100 U12_12V_REG_0.8 U12_12V_REG_1.8 U12_12V_REG_2.8 U13.2 | length 129.4
  TOP SIG w0.254: R12_MOSFET_BANK_0.2@8.5,46.85 8.575,46.85 9.204,47.479 13.796,47.479 14.425,46.85 R11_MOSFET_BANK_0.2@14.5,46.85 ; R12_MOSFET_BANK_1.2@34.5,46.85 34.575,46.85 35.204,47.479 39.796,47.479 40.425,46.85 R11_MOSFET_BANK_1.2@40.5,46.85 ; R12_MOSFET_BANK_2.2@60.5,46.85 60.575,46.85 61.204,47.479 65.796,47.479 66.425,46.85 R11_MOSFET_BANK_2.2@66.5,46.85 ; R12_MOSFET_BANK_3.2@86.5,46.85 86.575,46.85 87.204,47.479 91.796,47.479 92.425,46.85 R11_MOSFET_BANK_3.2@92.5,46.85
  TOP SIG w0.3: U6_MOSFET_BANK_0.2@26.125,56.3 26.135,56.29 26.135,55.54 26.674,55 28.021,55 ; R18_MOSFET_BANK_0.1@28.35,54 28.272,54.078 28.272,54.749 28.021,55 ; C5_MOSFET_BANK_0.1@28.521,55.5 28.5,55.5 28.314,55.314 28.314,55.292 28.021,55 ; U6_MOSFET_BANK_1.2@52.125,56.3 52.135,56.29 52.135,55.54 52.674,55 54.021,55 ; R18_MOSFET_BANK_1.1@54.35,54 54.272,54.078 54.272,54.749 54.021,55 ; C5_MOSFET_BANK_1.1@54.521,55.5 54.5,55.5 54.314,55.314 54.314,55.292 54.021,55 ; U6_MOSFET_BANK_2.2@78.125,56.3 78.135,56.29 78.135,55.54 78.674,55 80.021,55 ; R18_MOSFET_BANK_2.1@80.35,54 80.272,54.078 80.272,54.749 80.021,55 ; C5_MOSFET_BANK_2.1@80.521,55.5 80.5,55.5 80.314,55.314 80.314,55.292 80.021,55 ; U6_MOSFET_BANK_3.2@104.125,56.3 104.135,56.29 104.135,55.54 104.674,55 106.021,55 ; R18_MOSFET_BANK_3.1@106.35,54 106.272,54.078 106.272,54.749 106.021,55 ; C5_MOSFET_BANK_3.1@106.521,55.5 106.5,55.5 106.314,55.314 106.314,55.292 106.021,55 ; U12_12V_REG_2.8@111.5,73.983 111.612,74.095 U12_12V_REG_2.8@111.684,74.095 ; U12_12V_REG_1.8@143.5,73.983 143.612,74.095 U12_12V_REG_1.8@143.684,74.095 ; U12_12V_REG_0.8@175.5,73.983 175.612,74.095 U12_12V_REG_0.8@175.684,74.095
  TOP SIG w0.5: v1(7,68) 6.595,68.405 U1_MOSFET_BANK_0.8@6.595,69.816 6.595,72.095 7,72.5 C1_MOSFET_BANK_0.1@7.021,72.5 ; v1(13,68) 12.595,68.405 U2_MOSFET_BANK_0.8@12.595,69.816 12.595,72.095 13,72.5 C2_MOSFET_BANK_0.1@13.021,72.5 ; v1(19,68) 18.595,68.405 U4_MOSFET_BANK_0.8@18.595,69.816 18.595,72.095 19,72.5 C3_MOSFET_BANK_0.1@19.021,72.5 ; v1(25,68) 24.595,68.405 U5_MOSFET_BANK_0.8@24.595,69.816 24.595,72.095 25,72.5 C4_MOSFET_BANK_0.1@25.021,72.5 ; v1(33,68) 32.595,68.405 U1_MOSFET_BANK_1.8@32.595,69.816 32.595,72.095 33,72.5 C1_MOSFET_BANK_1.1@33.021,72.5 ; v1(39,68) 38.595,68.405 U2_MOSFET_BANK_1.8@38.595,69.816 38.595,72.095 39,72.5 C2_MOSFET_BANK_1.1@39.021,72.5 ; v1(45,68) 44.595,68.405 U4_MOSFET_BANK_1.8@44.595,69.816 44.595,72.095 45,72.5 C3_MOSFET_BANK_1.1@45.021,72.5 ; v1(51,68) 50.595,68.405 U5_MOSFET_BANK_1.8@50.595,69.816 50.595,72.095 51,72.5 C4_MOSFET_BANK_1.1@51.021,72.5 ; v1(59,68) 58.595,68.405 U1_MOSFET_BANK_2.8@58.595,69.816 58.595,72.095 59,72.5 C1_MOSFET_BANK_2.1@59.021,72.5 ; v1(65,68) 64.595,68.405 U2_MOSFET_BANK_2.8@64.595,69.816 64.595,72.095 65,72.5 C2_MOSFET_BANK_2.1@65.021,72.5 ; v1(71,68) 70.595,68.405 U4_MOSFET_BANK_2.8@70.595,69.816 70.595,72.095 71,72.5 C3_MOSFET_BANK_2.1@71.021,72.5 ; v1(77,68) 76.595,68.405 U5_MOSFET_BANK_2.8@76.595,69.816 76.595,72.095 77,72.5 C4_MOSFET_BANK_2.1@77.021,72.5 ; v1(85,68) 84.595,68.405 U1_MOSFET_BANK_3.8@84.595,69.816 84.595,72.095 85,72.5 C1_MOSFET_BANK_3.1@85.021,72.5 ; v1(91,68) 90.595,68.405 U2_MOSFET_BANK_3.8@90.595,69.816 90.595,72.095 91,72.5 C2_MOSFET_BANK_3.1@91.021,72.5 ; v1(97,68) 96.595,68.405 U4_MOSFET_BANK_3.8@96.595,69.816 96.595,72.095 97,72.5 C3_MOSFET_BANK_3.1@97.021,72.5 ; v1(103,68) 102.595,68.405 U5_MOSFET_BANK_3.8@102.595,69.816 102.595,72.095 103,72.5 C4_MOSFET_BANK_3.1@103.021,72.5 ; C48_12V_REG_2.1@111.5,71.979 U12_12V_REG_2.8@111.5,73.983 ; C48_12V_REG_1.1@143.5,71.979 U12_12V_REG_1.8@143.5,73.983 ; C48_12V_REG_0.1@175.5,71.979 U12_12V_REG_0.8@175.5,73.983
5V: C9.1 C15.2 R39.2 U8.3 U9.1
12V_FB_12V_REG_0: C43_12V_REG_0.2 C44_12V_REG_0.2 C45_12V_REG_0.2 C46_12V_REG_0.2 D7_12V_REG_0.2 L2_12V_REG_0.2 R5_12V_REG_0.1 U11_12V_REG_0.6 U12_12V_REG_0.1 U12_12V_REG_0.2 | length 3.1
  TOP SIG w0.3: D7_12V_REG_0.2@178.8,65.05 179.55,65.05 180.25,65.75 181.5,65.75 ; R5_12V_REG_0.1@180,72.15 R5_12V_REG_0.1@180.075,72.15
  other v1: 188.65,45.46
12V_FB_12V_REG_1: C43_12V_REG_1.2 C44_12V_REG_1.2 C45_12V_REG_1.2 C46_12V_REG_1.2 D7_12V_REG_1.2 L2_12V_REG_1.2 R5_12V_REG_1.1 U11_12V_REG_1.6 U12_12V_REG_1.1 U12_12V_REG_1.2 | length 3.1
  TOP SIG w0.3: D7_12V_REG_1.2@146.8,65.05 147.55,65.05 148.25,65.75 149.5,65.75 ; R5_12V_REG_1.1@148,72.15 R5_12V_REG_1.1@148.075,72.15
  other v1: 156.65,45.46
12V_FB_12V_REG_2: C43_12V_REG_2.2 C44_12V_REG_2.2 C45_12V_REG_2.2 C46_12V_REG_2.2 D7_12V_REG_2.2 L2_12V_REG_2.2 R5_12V_REG_2.1 U11_12V_REG_2.6 U12_12V_REG_2.1 U12_12V_REG_2.2 | length 3.1
  TOP SIG w0.3: D7_12V_REG_2.2@114.8,65.05 115.55,65.05 116.25,65.75 117.5,65.75 ; R5_12V_REG_2.1@116,72.15 R5_12V_REG_2.1@116.075,72.15
  other v1: 124.65,45.46
12V_LL_I_SENSE_12V_REG_0: R87_12V_REG_0.1
12V_LL_I_SENSE_12V_REG_1: R87_12V_REG_1.1
12V_LL_I_SENSE_12V_REG_2: R87_12V_REG_2.1
12V_LL_V_SENSE_12V_REG_0: R5_12V_REG_0.2 R7_12V_REG_0.1 | length 1.7
  TOP SIG w0.3: R7_12V_REG_0.1@180,69.15 R5_12V_REG_0.2@180,70.85
12V_LL_V_SENSE_12V_REG_1: R5_12V_REG_1.2 R7_12V_REG_1.1 | length 1.7
  TOP SIG w0.3: R7_12V_REG_1.1@148,69.15 R5_12V_REG_1.2@148,70.85
12V_LL_V_SENSE_12V_REG_2: R5_12V_REG_2.2 R7_12V_REG_2.1 | length 1.7
  TOP SIG w0.3: R7_12V_REG_2.1@116,69.15 R5_12V_REG_2.2@116,70.85
12V_OUT_12V_REG_0: J2.1 J2.2 J2.4 J2.5 U12_12V_REG_0.3 U12_12V_REG_0.4
12V_OUT_12V_REG_1: J3.1 J3.2 U12_12V_REG_1.3 U12_12V_REG_1.4
12V_OUT_12V_REG_2: J3.4 J3.5 U12_12V_REG_2.3 U12_12V_REG_2.4
ADC_IN0: R71.1 R79.2 U13.4
ADC_IN1: R72.1 R80.2 U13.5
ADC_IN2: R73.1 R81.2 U13.6
ADC_IN3: R74.1 R82.2 U13.7
ADC_IN4: R75.1 R83.2 U13.8
ADC_IN5: R76.1 R84.2 U13.9
ADC_IN6: R77.1 R85.2 U13.10
ADC_IN7: R78.1 R86.2 U13.11
ADC_MISO: U13.15
ADC_MISO_MOSFET_BANK_0: U6_MOSFET_BANK_0.15 U6_MOSFET_BANK_1.15 U6_MOSFET_BANK_2.15 U6_MOSFET_BANK_3.15
ADC_MOSI: U13.14
ADC_MOSI_MOSFET_BANK_0: U6_MOSFET_BANK_0.14 U6_MOSFET_BANK_1.14 U6_MOSFET_BANK_2.14 U6_MOSFET_BANK_3.14
ADC_nCS: U13.1
ADC_nCS_MOSFET_BANK_0: U6_MOSFET_BANK_0.1
ADC_nCS_MOSFET_BANK_1: U6_MOSFET_BANK_1.1
ADC_nCS_MOSFET_BANK_2: U6_MOSFET_BANK_2.1
ADC_nCS_MOSFET_BANK_3: U6_MOSFET_BANK_3.1
ADC_SCLK: U13.16
ADC_SCLK_MOSFET_BANK_0: U6_MOSFET_BANK_0.16 U6_MOSFET_BANK_1.16 U6_MOSFET_BANK_2.16 U6_MOSFET_BANK_3.16
ADDR_PWM_0: J2.10
ADDR_PWM_1: J2.11
ADDR_PWM_2: J2.13
ADDR_PWM_3: J2.14
ADDR_PWM_4: J3.10
ADDR_PWM_5: J3.11
ADDR_PWM_6: J3.13
ADDR_PWM_7: J3.14
BOOT: C22.2 R42.1 R44.2 U10.94
CAN_INH: U8.7
CAN_MISO: U8.6
CAN_MOSI: U8.11
CAN_N: C12.1 D3.1 J1.35 L1.4 R36.2 R37.2
CAN_nCS: U8.14
CAN_P: C14.2 D3.2 J1.34 L1.1 R37.1 R38.1
CAN_RX: U8.4
CAN_SCLK: U8.8
CAN_TX: U8.1
CAN_VSUP: D2.2
EXT_IN_0: D8_BYPASS_0.2 J1.20
EXT_IN_1: D8_BYPASS_1.2 J1.21
EXT_IN_2: D8_BYPASS_2.2 J1.31
EXT_IN_3: D8_BYPASS_3.2 J1.32
G_LED: R46.1 U10.15
GATE_BYPASS_0: Q7_BYPASS_0.4 Q8_BYPASS_0.4 R58_BYPASS_0.2 R59_BYPASS_0.1
GATE_BYPASS_1: Q7_BYPASS_1.4 Q8_BYPASS_1.4 R58_BYPASS_1.2 R59_BYPASS_1.1
GATE_BYPASS_2: Q7_BYPASS_2.4 Q8_BYPASS_2.4 R58_BYPASS_2.2 R59_BYPASS_2.1
GATE_BYPASS_3: Q7_BYPASS_3.4 Q8_BYPASS_3.4 R58_BYPASS_3.2 R59_BYPASS_3.1
GND: C1_MOSFET_BANK_0.2 C1_MOSFET_BANK_1.2 C1_MOSFET_BANK_2.2 C1_MOSFET_BANK_3.2 C2_MOSFET_BANK_0.2 C2_MOSFET_BANK_1.2 C2_MOSFET_BANK_2.2 C2_MOSFET_BANK_3.2 C3_MOSFET_BANK_0.2 C3_MOSFET_BANK_1.2 C3_MOSFET_BANK_2.2 C3_MOSFET_BANK_3.2 C4_MOSFET_BANK_0.2 C4_MOSFET_BANK_1.2 C4_MOSFET_BANK_2.2 C4_MOSFET_BANK_3.2 C5_MOSFET_BANK_0.2 C5_MOSFET_BANK_1.2 C5_MOSFET_BANK_2.2 C5_MOSFET_BANK_3.2 C6_MOSFET_BANK_0.2 C6_MOSFET_BANK_1.2 C6_MOSFET_BANK_2.2 C6_MOSFET_BANK_3.2 C7_MOSFET_BANK_0.2 C7_MOSFET_BANK_1.2 C7_MOSFET_BANK_2.2 C7_MOSFET_BANK_3.2 C8.2 C9.2 C10.2 C11.2 C12.2 C13.2 C14.1 C15.1 C16.2 C17.1 C18.1 C19.1 C20.1 C21.1 C23.1 C24.1 C25.1 C26.1 C27.1 C28.1 C29.1 C30.1 C31.1 C32.1 C33.1 C34.1 C35.1 C36.1 C37.1 C38.1 C39.1 C40_12V_REG_0.1 C40_12V_REG_1.1 C40_12V_REG_2.1 C41_12V_REG_0.1 C41_12V_REG_1.1 C41_12V_REG_2.1 C42_12V_REG_0.1 C42_12V_REG_1.1 C42_12V_REG_2.1 C43_12V_REG_0.1 C43_12V_REG_1.1 C43_12V_REG_2.1 C44_12V_REG_0.1 C44_12V_REG_1.1 C44_12V_REG_2.1 C45_12V_REG_0.1 C45_12V_REG_1.1 C45_12V_REG_2.1 C46_12V_REG_0.1 C46_12V_REG_1.1 C46_12V_REG_2.1 C48_12V_REG_0.2 C48_12V_REG_1.2 C48_12V_REG_2.2 C49.2 C50.2 C51.2 D3.3 D6_12V_REG_0.2 D6_12V_REG_1.2 D6_12V_REG_2.2 J2.6 J2.7 J2.8 J2.9 J3.6 J3.7 J3.8 J3.9 J4.3 J4.5 pad.2 Q5.2 Q6_12V_REG_0.2 Q6_12V_REG_1.2 Q6_12V_REG_2.2 Q9_BYPASS_0.1 Q9_BYPASS_1.1 Q9_BYPASS_2.1 Q9_BYPASS_3.1 R7_12V_REG_0.2 R7_12V_REG_1.2 R7_12V_REG_2.2 R14_MOSFET_BANK_0.2 R14_MOSFET_BANK_1.2 R14_MOSFET_BANK_2.2 R14_MOSFET_BANK_3.2 R24_MOSFET_BANK_0.2 R24_MOSFET_BANK_1.2 R24_MOSFET_BANK_2.2 R24_MOSFET_BANK_3.2 R25_MOSFET_BANK_0.2 R25_MOSFET_BANK_1.2 R25_MOSFET_BANK_2.2 R25_MOSFET_BANK_3.2 R26_MOSFET_BANK_0.2 R26_MOSFET_BANK_1.2 R26_MOSFET_BANK_2.2 R26_MOSFET_BANK_3.2 R27_MOSFET_BANK_0.2 R27_MOSFET_BANK_1.2 R27_MOSFET_BANK_2.2 R27_MOSFET_BANK_3.2 R28.1 R30.1 R33.1 R40.1 R44.1 R48.1 R50_12V_REG_0.2 R50_12V_REG_1.2 R50_12V_REG_2.2 R53_12V_REG_0.2 R53_12V_REG_1.2 R53_12V_REG_2.2 R54_12V_REG_0.1 R54_12V_REG_1.1 R54_12V_REG_2.1 R59_BYPASS_0.2 R59_BYPASS_1.2 R59_BYPASS_2.2 R59_BYPASS_3.2 R61_BYPASS_0.1 R61_BYPASS_1.1 R61_BYPASS_2.1 R61_BYPASS_3.1 R79.1 R80.1 R81.1 R82.1 R83.1 R84.1 R85.1 R86.1 SW1.1 SW3.2 U1_MOSFET_BANK_0.5 U1_MOSFET_BANK_1.5 U1_MOSFET_BANK_2.5 U1_MOSFET_BANK_3.5 U2_MOSFET_BANK_0.5 U2_MOSFET_BANK_1.5 U2_MOSFET_BANK_2.5 U2_MOSFET_BANK_3.5 U3_MOSFET_BANK_0.2 U3_MOSFET_BANK_0.6 U3_MOSFET_BANK_1.2 U3_MOSFET_BANK_1.6 U3_MOSFET_BANK_2.2 U3_MOSFET_BANK_2.6 U3_MOSFET_BANK_3.2 U3_MOSFET_BANK_3.6 U4_MOSFET_BANK_0.5 U4_MOSFET_BANK_1.5 U4_MOSFET_BANK_2.5 U4_MOSFET_BANK_3.5 U5_MOSFET_BANK_0.5 U5_MOSFET_BANK_1.5 U5_MOSFET_BANK_2.5 U5_MOSFET_BANK_3.5 U6_MOSFET_BANK_0.3 U6_MOSFET_BANK_0.12 U6_MOSFET_BANK_1.3 U6_MOSFET_BANK_1.12 U6_MOSFET_BANK_2.3 U6_MOSFET_BANK_2.12 U6_MOSFET_BANK_3.3 U6_MOSFET_BANK_3.12 U7.5 U8.2 U9.2 U10.10 U10.19 U10.26 U10.49 U10.74 U10.99 U11_12V_REG_0.4 U11_12V_REG_0.8 U11_12V_REG_1.4 U11_12V_REG_1.8 U11_12V_REG_2.4 U11_12V_REG_2.8 U12_12V_REG_0.5 U12_12V_REG_1.5 U12_12V_REG_2.5 U13.3 U13.12 Y1.2 Y1.4
I_nFAULT: U7.6
I_nFAULT_12V_REG_0: R51_12V_REG_0.2 R55_12V_REG_0.1 U12_12V_REG_0.6 | length 9.7
  TOP SIG w0.3: U12_12V_REG_0.6@175.684,76.635 176.255,76.635 176.367,76.523 176.367,76.233 177.5,75.1 177.5,73.15 R51_12V_REG_0.2@178.5,72.15 178.575,72.15 179.227,71.498 179.227,69.802 178.575,69.15 R55_12V_REG_0.1@178.5,69.15
I_nFAULT_12V_REG_1: R51_12V_REG_1.2 R55_12V_REG_1.1 U12_12V_REG_1.6 | length 9.7
  TOP SIG w0.3: U12_12V_REG_1.6@143.684,76.635 144.255,76.635 144.367,76.523 144.367,76.233 145.5,75.1 145.5,73.15 R51_12V_REG_1.2@146.5,72.15 146.575,72.15 147.227,71.498 147.227,69.802 146.575,69.15 R55_12V_REG_1.1@146.5,69.15
I_nFAULT_12V_REG_2: R51_12V_REG_2.2 R55_12V_REG_2.1 U12_12V_REG_2.6 | length 9.7
  TOP SIG w0.3: U12_12V_REG_2.6@111.684,76.635 112.255,76.635 112.367,76.523 112.367,76.233 113.5,75.1 113.5,73.15 R51_12V_REG_2.2@114.5,72.15 114.575,72.15 115.227,71.498 115.227,69.802 114.575,69.15 R55_12V_REG_2.1@114.5,69.15
I_nFAULT_MOSFET_BANK_0: R10_MOSFET_BANK_0.2 U1_MOSFET_BANK_0.6 U2_MOSFET_BANK_0.6 U4_MOSFET_BANK_0.6 U5_MOSFET_BANK_0.6 | length 15
  TOP SIG w0.3: v1@9,68.054 v1@9.135,68.189 ; v1@9,68.054 v1(9,68) v1@9,68.054 ; v1@9,68.054 v1@9.135,68.189 ; v1@9.135,68.189 U1_MOSFET_BANK_0.6@9.135,69.816 v1@9.135,68.189 ; v1@15,68.054 v1@15.135,68.189 ; v1@15,68.054 v1(15,68) v1@15,68.054 ; v1@15,68.054 v1@15.135,68.189 ; v1@15.135,68.189 U2_MOSFET_BANK_0.6@15.135,69.816 v1@15.135,68.189 ; v1@21,68.054 v1@21.135,68.189 ; v1@21,68.054 v1(21,68) v1@21,68.054 ; v1@21,68.054 v1@21.135,68.189 ; v1@21.135,68.189 U4_MOSFET_BANK_0.6@21.135,69.816 v1@21.135,68.189 ; v1@27,68.054 v1@27.135,68.189 ; v1@27,68.054 v1(27,68) v1@27,68.054 ; v1@27,68.054 v1@27.135,68.189 ; v1@27.135,68.189 U5_MOSFET_BANK_0.6@27.135,69.816 v1@27.135,68.189
  other v1: 9,68 15,68 21,68 27,68
I_nFAULT_MOSFET_BANK_1: R10_MOSFET_BANK_1.2 U1_MOSFET_BANK_1.6 U2_MOSFET_BANK_1.6 U4_MOSFET_BANK_1.6 U5_MOSFET_BANK_1.6 | length 15
  TOP SIG w0.3: v1@35,68.054 v1@35.135,68.189 ; v1@35,68.054 v1@35.135,68.189 ; v1@35,68.054 v1(35,68) v1@35,68.054 ; v1@35.135,68.189 U1_MOSFET_BANK_1.6@35.135,69.816 v1@35.135,68.189 ; v1@41,68.054 v1@41.135,68.189 ; v1@41,68.054 v1@41.135,68.189 ; v1@41,68.054 v1(41,68) v1@41,68.054 ; v1@41.135,68.189 U2_MOSFET_BANK_1.6@41.135,69.816 v1@41.135,68.189 ; v1@47,68.054 v1@47.135,68.189 ; v1@47,68.054 v1@47.135,68.189 ; v1@47,68.054 v1(47,68) v1@47,68.054 ; v1@47.135,68.189 U4_MOSFET_BANK_1.6@47.135,69.816 v1@47.135,68.189 ; v1@53,68.054 v1@53.135,68.189 ; v1@53,68.054 v1@53.135,68.189 ; v1@53,68.054 v1(53,68) v1@53,68.054 ; v1@53.135,68.189 U5_MOSFET_BANK_1.6@53.135,69.816 v1@53.135,68.189
  other v1: 35,68 41,68 47,68 53,68
I_nFAULT_MOSFET_BANK_2: R10_MOSFET_BANK_2.2 U1_MOSFET_BANK_2.6 U2_MOSFET_BANK_2.6 U4_MOSFET_BANK_2.6 U5_MOSFET_BANK_2.6 | length 15
  TOP SIG w0.3: v1@61,68.054 v1@61.135,68.189 ; v1@61,68.054 v1@61.135,68.189 ; v1@61,68.054 v1(61,68) v1@61,68.054 ; v1@61.135,68.189 U1_MOSFET_BANK_2.6@61.135,69.816 v1@61.135,68.189 ; v1@67,68.054 v1@67.135,68.189 ; v1@67,68.054 v1@67.135,68.189 ; v1@67,68.054 v1(67,68) v1@67,68.054 ; v1@67.135,68.189 U2_MOSFET_BANK_2.6@67.135,69.816 v1@67.135,68.189 ; v1@73,68.054 v1@73.135,68.189 ; v1@73,68.054 v1@73.135,68.189 ; v1@73,68.054 v1(73,68) v1@73,68.054 ; v1@73.135,68.189 U4_MOSFET_BANK_2.6@73.135,69.816 v1@73.135,68.189 ; v1@79,68.054 v1@79.135,68.189 ; v1@79,68.054 v1@79.135,68.189 ; v1@79,68.054 v1(79,68) v1@79,68.054 ; v1@79.135,68.189 U5_MOSFET_BANK_2.6@79.135,69.816 v1@79.135,68.189
  other v1: 61,68 67,68 73,68 79,68
I_nFAULT_MOSFET_BANK_3: R10_MOSFET_BANK_3.2 U1_MOSFET_BANK_3.6 U2_MOSFET_BANK_3.6 U4_MOSFET_BANK_3.6 U5_MOSFET_BANK_3.6 | length 15
  TOP SIG w0.3: v1@87,68.054 v1@87.135,68.189 ; v1@87,68.054 v1@87.135,68.189 ; v1@87,68.054 v1(87,68) v1@87,68.054 ; v1@87.135,68.189 U1_MOSFET_BANK_3.6@87.135,69.816 v1@87.135,68.189 ; v1@93,68.054 v1@93.135,68.189 ; v1@93,68.054 v1@93.135,68.189 ; v1@93,68.054 v1(93,68) v1@93,68.054 ; v1@93.135,68.189 U2_MOSFET_BANK_3.6@93.135,69.816 v1@93.135,68.189 ; v1@99,68.054 v1@99.135,68.189 ; v1@99,68.054 v1@99.135,68.189 ; v1@99,68.054 v1(99,68) v1@99,68.054 ; v1@99.135,68.189 U4_MOSFET_BANK_3.6@99.135,69.816 v1@99.135,68.189 ; v1@105,68.054 v1@105.135,68.189 ; v1@105,68.054 v1@105.135,68.189 ; v1@105,68.054 v1(105,68) v1@105,68.054 ; v1@105.135,68.189 U5_MOSFET_BANK_3.6@105.135,69.816 v1@105.135,68.189
  other v1: 87,68 93,68 99,68 105,68
IN_0: J1.9 R63.1 R71.2
IN_1: J1.10 R64.1 R72.2
IN_2: J1.11 R65.1 R73.2
IN_3: J1.12 R66.1 R74.2
IN_4: J1.22 R67.1 R75.2
IN_5: J1.23 R68.1 R76.2
IN_6: J1.33 R69.1 R77.2
IN_7: R70.1 R78.2
INH: R32.1
INH_EXT_0: R60_BYPASS_0.2
INH_EXT_1: R60_BYPASS_1.2
INH_EXT_2: R60_BYPASS_2.2
INH_EXT_3: R60_BYPASS_3.2
INT_5V_SENSE: R39.1 R40.2
LL_INH_12V_REG_0: R52_12V_REG_0.2
LL_INH_12V_REG_1: R52_12V_REG_1.2
LL_INH_12V_REG_2: R52_12V_REG_2.2
M1_I_SENSE_MOSFET_BANK_0: R19_MOSFET_BANK_0.2 U1_MOSFET_BANK_0.7 | length 4.6
  TOP SIG w0.3: R19_MOSFET_BANK_0.2@23.5,60.15 v1(23.5,61) ; v1@7.865,68.189 U1_MOSFET_BANK_0.7@7.865,69.816 v1@7.865,68.189 ; v1@7.865,68.189 v1@8,68.054 ; v1@7.865,68.189 v1@8,68.054 ; v1@8,68.054 v1(8,68) v1@8,68.054
  other v1: 8,68
M1_I_SENSE_MOSFET_BANK_1: R19_MOSFET_BANK_1.2 U1_MOSFET_BANK_1.7 | length 4.6
  TOP SIG w0.3: R19_MOSFET_BANK_1.2@49.5,60.15 v1(49.5,61) ; v1@33.865,68.189 U1_MOSFET_BANK_1.7@33.865,69.816 v1@33.865,68.189 ; v1@33.865,68.189 v1@34,68.054 ; v1@33.865,68.189 v1@34,68.054 ; v1@34,68.054 v1(34,68) v1@34,68.054
  other v1: 34,68
M1_I_SENSE_MOSFET_BANK_2: R19_MOSFET_BANK_2.2 U1_MOSFET_BANK_2.7 | length 4.6
  TOP SIG w0.3: R19_MOSFET_BANK_2.2@75.5,60.15 v1(75.5,61) ; v1@59.865,68.189 v1@60,68.054 ; v1@59.865,68.189 U1_MOSFET_BANK_2.7@59.865,69.816 v1@59.865,68.189 ; v1@59.865,68.189 v1@60,68.054 ; v1@60,68.054 v1(60,68) v1@60,68.054
  other v1: 60,68
M1_I_SENSE_MOSFET_BANK_3: R19_MOSFET_BANK_3.2 U1_MOSFET_BANK_3.7 | length 4.6
  TOP SIG w0.3: R19_MOSFET_BANK_3.2@101.5,60.15 v1(101.5,61) ; v1@85.865,68.189 v1@86,68.054 ; v1@85.865,68.189 U1_MOSFET_BANK_3.7@85.865,69.816 v1@85.865,68.189 ; v1@85.865,68.189 v1@86,68.054 ; v1@86,68.054 v1(86,68) v1@86,68.054
  other v1: 86,68
M1_OUT_MOSFET_BANK_0: F2_MOSFET_BANK_0.1 R20_MOSFET_BANK_0.2 U1_MOSFET_BANK_0.3 U1_MOSFET_BANK_0.4 | length 11.4
  TOP SIG w1: U1_MOSFET_BANK_0.4@10.405,65.184 10.405,67.405 11,68 11.5,68.5 F2_MOSFET_BANK_0.1@11.5,76.166
M1_OUT_MOSFET_BANK_1: F2_MOSFET_BANK_1.1 R20_MOSFET_BANK_1.2 U1_MOSFET_BANK_1.3 U1_MOSFET_BANK_1.4 | length 11.4
  TOP SIG w1: U1_MOSFET_BANK_1.4@36.405,65.184 36.405,67.405 37,68 37.5,68.5 F2_MOSFET_BANK_1.1@37.5,76.166
M1_OUT_MOSFET_BANK_2: F2_MOSFET_BANK_2.1 R20_MOSFET_BANK_2.2 U1_MOSFET_BANK_2.3 U1_MOSFET_BANK_2.4 | length 11.4
  TOP SIG w1: U1_MOSFET_BANK_2.4@62.405,65.184 62.405,67.405 63,68 63.5,68.5 F2_MOSFET_BANK_2.1@63.5,76.166
M1_OUT_MOSFET_BANK_3: F2_MOSFET_BANK_3.1 R20_MOSFET_BANK_3.2 U1_MOSFET_BANK_3.3 U1_MOSFET_BANK_3.4 | length 11.4
  TOP SIG w1: U1_MOSFET_BANK_3.4@88.405,65.184 88.405,67.405 89,68 89.5,68.5 F2_MOSFET_BANK_3.1@89.5,76.166
M1_PRE_SHUNT_MOSFET_BANK_0: U1_MOSFET_BANK_0.1 U1_MOSFET_BANK_0.2 U3_MOSFET_BANK_0.18 | length 7.7
  TOP SIG w1: 7.865,66.121 U1_MOSFET_BANK_0.2@7.865,65.184 7.865,63.635 9.325,62.175 U3_MOSFET_BANK_0.18@9.325,60.05 9.325,59.075
M1_PRE_SHUNT_MOSFET_BANK_1: U1_MOSFET_BANK_1.1 U1_MOSFET_BANK_1.2 U3_MOSFET_BANK_1.18 | length 7.7
  TOP SIG w1: 33.865,66.121 U1_MOSFET_BANK_1.2@33.865,65.184 33.865,63.635 35.325,62.175 U3_MOSFET_BANK_1.18@35.325,60.05 35.325,59.075
M1_PRE_SHUNT_MOSFET_BANK_2: U1_MOSFET_BANK_2.1 U1_MOSFET_BANK_2.2 U3_MOSFET_BANK_2.18 | length 7.7
  TOP SIG w1: 59.865,66.121 U1_MOSFET_BANK_2.2@59.865,65.184 59.865,63.635 61.325,62.175 U3_MOSFET_BANK_2.18@61.325,60.05 61.325,59.075
M1_PRE_SHUNT_MOSFET_BANK_3: U1_MOSFET_BANK_3.1 U1_MOSFET_BANK_3.2 U3_MOSFET_BANK_3.18 | length 7.7
  TOP SIG w1: 85.865,66.121 U1_MOSFET_BANK_3.2@85.865,65.184 85.865,63.635 87.325,62.175 U3_MOSFET_BANK_3.18@87.325,60.05 87.325,59.075
M1_TRIG_MOSFET_BANK_0: R1_MOSFET_BANK_0.2 U3_MOSFET_BANK_0.3 | length 4.3
  TOP SIG w0.3: R1_MOSFET_BANK_0.2@7,48.15 7.075,48.15 8.025,49.1 8.8,49.1 9.325,49.625 U3_MOSFET_BANK_0.3@9.325,50.95
M1_TRIG_MOSFET_BANK_1: R1_MOSFET_BANK_1.2 U3_MOSFET_BANK_1.3 | length 4.3
  TOP SIG w0.3: R1_MOSFET_BANK_1.2@33,48.15 33.075,48.15 34.025,49.1 34.8,49.1 35.325,49.625 U3_MOSFET_BANK_1.3@35.325,50.95
M1_TRIG_MOSFET_BANK_2: R1_MOSFET_BANK_2.2 U3_MOSFET_BANK_2.3 | length 4.3
  TOP SIG w0.3: R1_MOSFET_BANK_2.2@59,48.15 59.075,48.15 60.025,49.1 60.8,49.1 61.325,49.625 U3_MOSFET_BANK_2.3@61.325,50.95
M1_TRIG_MOSFET_BANK_3: R1_MOSFET_BANK_3.2 U3_MOSFET_BANK_3.3 | length 4.3
  TOP SIG w0.3: R1_MOSFET_BANK_3.2@85,48.15 85.075,48.15 86.025,49.1 86.8,49.1 87.325,49.625 U3_MOSFET_BANK_3.3@87.325,50.95
M2_I_SENSE_MOSFET_BANK_0: R17_MOSFET_BANK_0.2 U2_MOSFET_BANK_0.7 | length 4.6
  TOP SIG w0.3: R17_MOSFET_BANK_0.2@25,60.15 v1(25,61) ; v1@13.865,68.189 U2_MOSFET_BANK_0.7@13.865,69.816 v1@13.865,68.189 ; v1@13.865,68.189 v1@14,68.054 ; v1@13.865,68.189 v1@14,68.054 ; v1@14,68.054 v1(14,68) v1@14,68.054
  other v1: 14,68
M2_I_SENSE_MOSFET_BANK_1: R17_MOSFET_BANK_1.2 U2_MOSFET_BANK_1.7 | length 4.6
  TOP SIG w0.3: R17_MOSFET_BANK_1.2@51,60.15 v1(51,61) ; v1@39.865,68.189 U2_MOSFET_BANK_1.7@39.865,69.816 v1@39.865,68.189 ; v1@39.865,68.189 v1@40,68.054 ; v1@39.865,68.189 v1@40,68.054 ; v1@40,68.054 v1(40,68) v1@40,68.054
  other v1: 40,68
M2_I_SENSE_MOSFET_BANK_2: R17_MOSFET_BANK_2.2 U2_MOSFET_BANK_2.7 | length 4.6
  TOP SIG w0.3: R17_MOSFET_BANK_2.2@77,60.15 v1(77,61) ; v1@65.865,68.189 v1@66,68.054 ; v1@65.865,68.189 U2_MOSFET_BANK_2.7@65.865,69.816 v1@65.865,68.189 ; v1@65.865,68.189 v1@66,68.054 ; v1@66,68.054 v1(66,68) v1@66,68.054
  other v1: 66,68
M2_I_SENSE_MOSFET_BANK_3: R17_MOSFET_BANK_3.2 U2_MOSFET_BANK_3.7 | length 4.6
  TOP SIG w0.3: R17_MOSFET_BANK_3.2@103,60.15 v1(103,61) ; v1@91.865,68.189 v1@92,68.054 ; v1@91.865,68.189 U2_MOSFET_BANK_3.7@91.865,69.816 v1@91.865,68.189 ; v1@91.865,68.189 v1@92,68.054 ; v1@92,68.054 v1(92,68) v1@92,68.054
  other v1: 92,68
M2_OUT_MOSFET_BANK_0: F3_MOSFET_BANK_0.1 R21_MOSFET_BANK_0.2 U2_MOSFET_BANK_0.3 U2_MOSFET_BANK_0.4 | length 11.4